# Altium PCB Orient3.PcbDoc (part 2 of 2)
Units mil, origin at the board's own origin, x right, y up, seen from the top; angles counter-clockwise.
Board outline 2100 x 1950 mil, 2 copper layers (Top Layer, Bottom Layer); 76 components, 64 nets, 287 pads, 130 vias.
Unrouted connection lines stored in the file: 10.
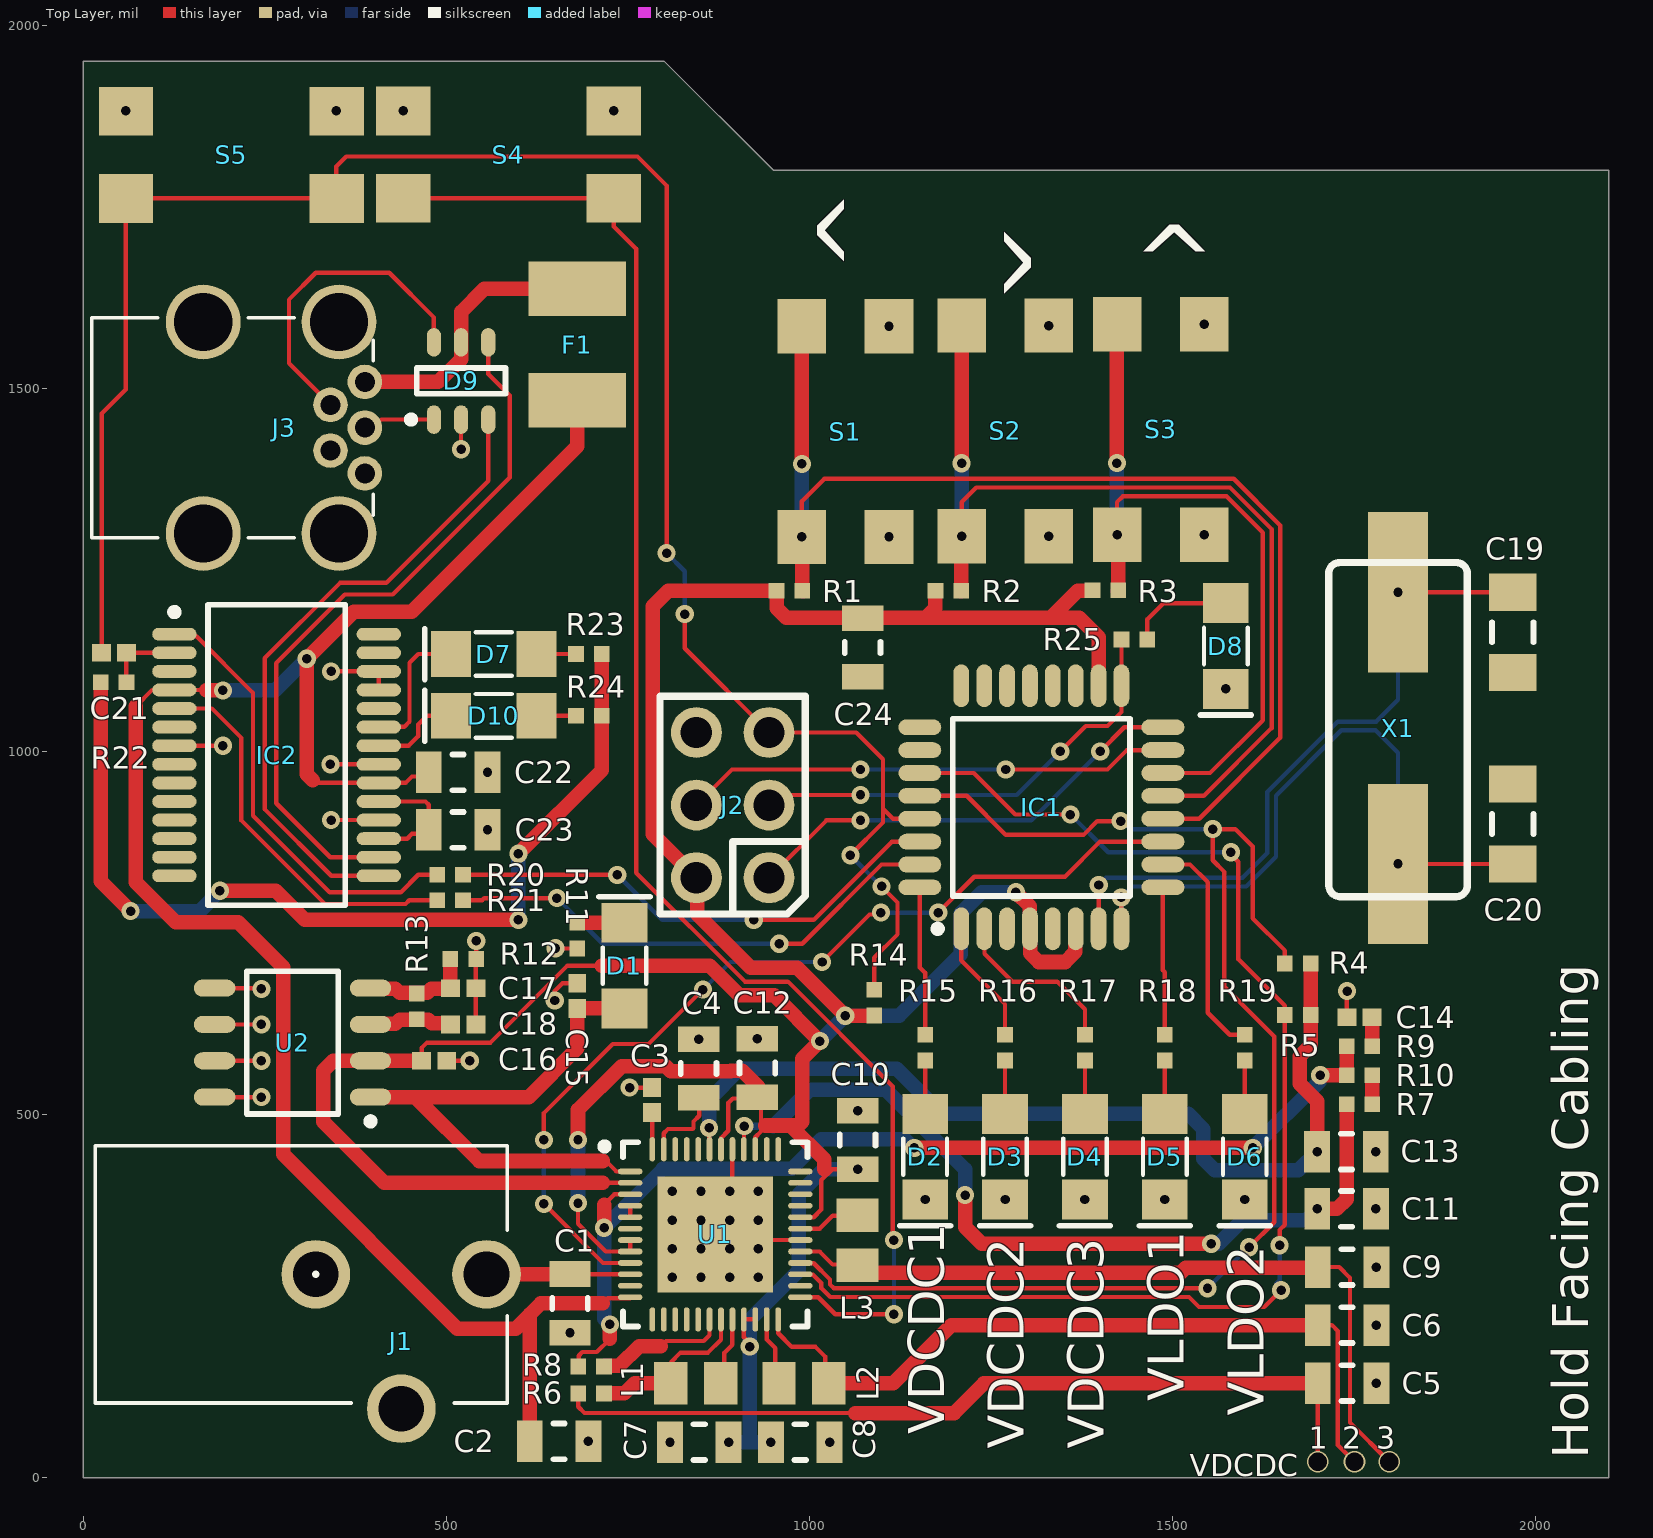
[diagram p0: Top Layer view]

## Via types
v1: diameter 25, hole 13, Top Layer to Bottom Layer, 121 vias
v2: diameter 25/13.78 (per signal layer), hole 13, Top Layer to Bottom Layer, 4 vias
v3: diameter 30, hole 25, Top Layer to Bottom Layer, 3 vias
v4: diameter 25, hole 13, Top Layer to Bottom Layer, tented both sides, 2 vias

## Nets (pads, with @x,y where several pads share a name; then routed paths per layer and width w, separated by ;. In a path a pad name is that pad's centre, name@x,y a point inside that pad or via, vN(x,y) a via of type N, cw(c..) or ccw(c..) an arc to the next point about the centre after c; other vN are vias at no path point) (continued)
VDCDC3: (continued)
  Top Layer w20: L3.2@1065.33,293.42 L3.2 1076.75,282 1510.78,282 1518,289.22 1592.75,289.22 1593.2,288.77 1616.8,288.77 1617.25,289.22 1698.86,289.22 C9.2
VDD_1V8: C11.2 R7.1 U1.40 | length 1172.4
  Top Layer w6: U1.40 909.6,452.36 909.6,483.6 v4(910,484)
  Top Layer w20: v1(1214,389) 1214,345 1237,322 v1(1553,322) ; v1(1698.93,370) 1726,370 1739.28,383.28 R7.1
  Bottom Layer w10: v4(910,484) 950,484
  Bottom Layer w20: 950,484 999.85,533.85 1104.45,533.85 1214,424.31 v1(1214,389) ; v1(1553,322) 1563,322 1595.5,354.5 1683.43,354.5 v1(1698.93,370)
VDD_3V3A: C13.2 R4.2 R5.2 U1.43 | length 1291.5
  Top Layer w6: v4(861.51,481.52) 861.82,481.21 861.82,452.43 U1.43
  Top Layer w20: R4.2 R5.2 1689.72,595.72 1674.5,580.5 1674.5,542.19 1698.65,518.05 v1(1698.65,449)
  Bottom Layer w20: v4(861.51,481.52) 861.51,520.51 904,563 1120,563 1182,501 1521,501 1542,480 1542,439 1558,423 1672.65,423 v1(1698.65,449)
VDD_3V3AUX: C15.2 D1.2 U1.1 U2.1 | length 770.8
  Top Layer w6: 715,436 719.46,436 733.84,421.61 U1.1
  Top Layer w20: U2.1 457,524 ; 715,436 545,436 457,524 ; D1.2 C15.2 680,591 613,524 457,524
VDD_3V3B: C18.1 R13.2 U2.3 | length 116.4
  Top Layer w20: U2.3 395.98,624.69 429.69,624.69 435.6,630.6 458.32,630.6 R13.2 459.83,630.46 474.54,630.46 479.53,625.47 504.2,625.47 C18.1
VDD_5V: C1.1 J1.1 U1.10 | length 197.9
  Top Layer w6: C1.1@669.65,280 669.76,279.88 U1.10
  Top Layer w20: J1.1 C1.1@669.65,280
VDDS: R7.2 R10.2 | length 40
  Top Layer w20: R7.2 R10.2
VDDS_DDR: C5.2 R6.2 | length 1165.6
  Top Layer w6: R6.2 681.28,97.72 690,89 1063,89 ; v3@1699.65,21.65 C5.2
  Top Layer w20: 1063,89 1199,89 1240,130 C5.2
  other v3: 1699.65,22
VIO: R8.2 U1.18 | length 185
  Top Layer w6: 795.14,181.14 802.14,188.14 854.14,188.14 862.13,196.13 U1.18
  Top Layer w20: R8.2 717.54,153.83 737.83,153.83 765.14,181.14 795.14,181.14
VLDO1: R8.1 R9.1 R10.1 U1.3 | length 1461.2
  Top Layer w6: R8.1 682,153.72 682,168 686.93,172.93 706.93,172.93 724.95,190.95 ; 717,376 731.12,390.12 U1.3
  Top Layer w20: v1(717,344) 717,376 ; 724.95,190.95 724.95,210.95 v1(725,211) ; v1(1144,454) v1(1610,454) ; v1(1703,554) R10.1 R9.1
  Bottom Layer w20: v1(725,211) 717,219 v1(717,344) 798,425 975,425 1016,466 1130.65,466 1142.65,454 v1(1144,454) ; v1(1610,454) 1702.04,546.04 1702.04,553.04 v1(1703,554)
VRTC: C14.2 R9.2 | length 40.2
  Top Layer w20: C14.2 1774.72,633.61 R9.2
VUSB: D9.5 F1.1 J3.1 | length 383.7
  Top Layer w20: J3.1 488.66,1508.66 520,1540 D9.5 520,1605 551.77,1636.77 F1.1
pads on no net: IC1.19 IC1.20 IC1.22 IC1.23 IC1.24 IC1.25 IC1.26 IC2.3 IC2.6 IC2.8 IC2.9 IC2.10 IC2.11 IC2.12 IC2.13 IC2.14 IC2.24 IC2.27 IC2.28 J1.3 J3.4 U1.6 U1.11 U1.13 U1.14 U1.15 U1.16 U1.17 U1.26 U1.33 U1.34 U1.35 U1.36 U1.37 U1.38 U1.44 U1.45 U1.46

## Polygon pours and split planes (outlines as drawn)
GND on Bottom Layer "GND" (solid, pour order 2): 0,0 0,1950 800,1950 950,1800 2100,1800 2100,0

## Silkscreen, mask and mechanical layers (free items; w line width, h text height)
Top Overlay:
  text "^" at 1205,1730 h100 r270
  text "^" at 1110,1660 h100 r90
  text "^" at 1445,1625 h100
  text "VLDO1" at 1515,105 h50 r90
  text "VLDO2" at 1625,85 h50 r90
  text "VDCDC1" at 1185,60 h50 r90
  text "VDCDC2" at 1295,40 h50 r90
  text "VDCDC3" at 1405,40 h50 r90
  text "1" at 1687,40 h30
  text "2" at 1733,40 h30
  text "3" at 1780,40 h30
  text "Hold Facing Cabling" at 2072,26 h50 r90
  text "VDCDC" at 1523,2 h30
Bottom Overlay:
  text "90% Asian / POC (Piece Of Crap) / PCB (Pretty Crappy Board)" at 1799,448 h50 r270
Mechanical 1:
  lines w0.5: 0,0 2050,0 2100,0 2100,1800 2050,1800 950,1800 800,1950 0,1950 0,0